# Altium PCB Uzcar.PcbDoc
Units mm, origin at the board's own origin, x right, y up, seen from the top; angles counter-clockwise.
Board outline 90.32 x 30.2 mm, 2 copper layers (Top Layer, Bottom Layer); 70 components, 54 nets, 230 pads, 0 vias.
Unrouted connection lines stored in the file: 159.
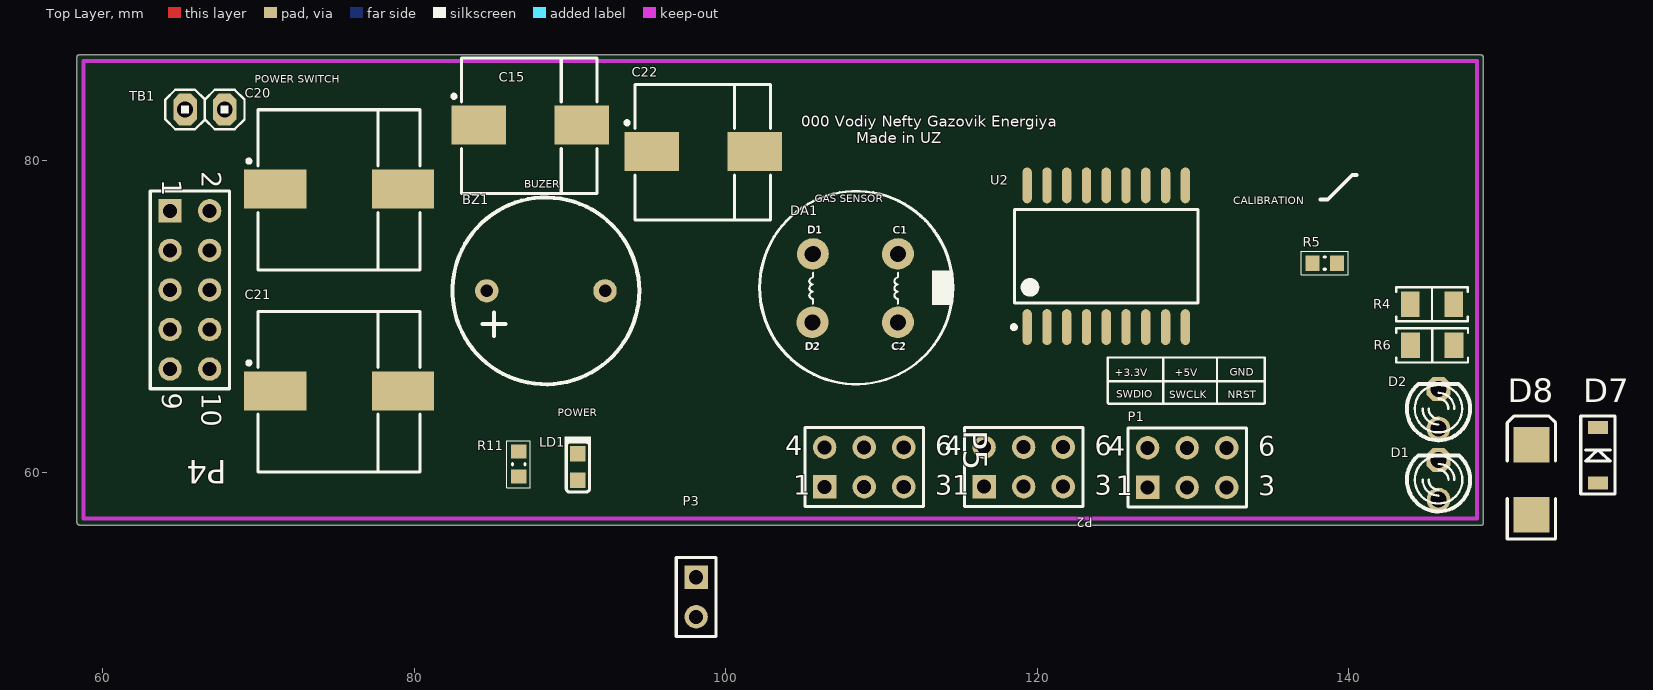
[diagram p0: Top Layer view]
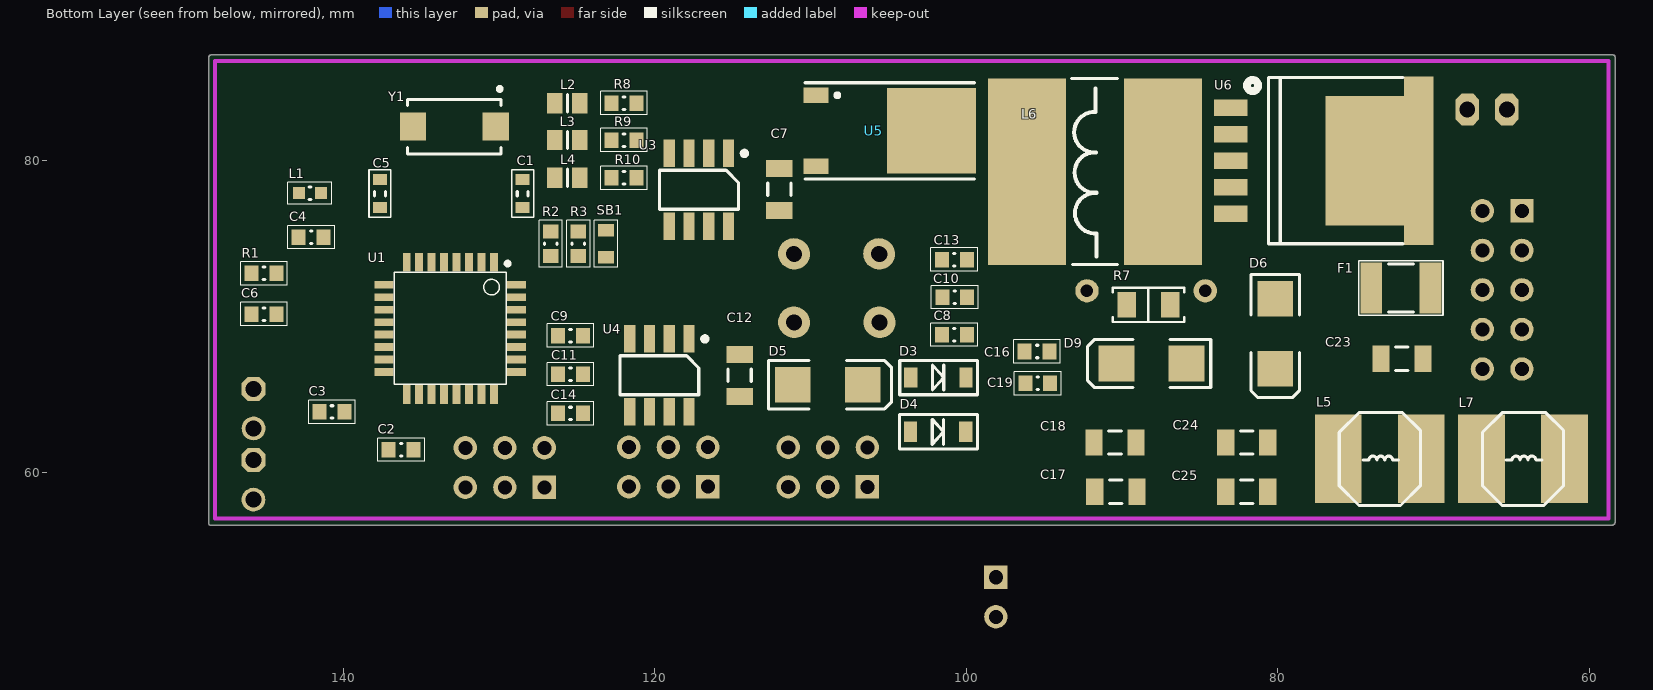
[diagram p1: Bottom Layer view, seen from below]

## Layer stack, top to bottom
Top Solder: solder mask 0.0102, Solder Resist, Dk 3.5
Top Layer: signal copper 0.0356
Dielectric 1: dielectric 0.32, FR-4, Dk 4.8
Bottom Layer: signal copper 0.0356
Bottom Solder: solder mask 0.0102, Solder Resist, Dk 3.5

## Board outline
58.42,56.642 cw(c58.462,56.762) 58.335,56.762 58.335,86.663 cw(c58.462,86.663) 58.462,86.79 148.505,86.79 cw(c148.505,86.663) 148.633,86.663 148.633,56.782 cw(c148.523,56.716) 148.651,56.716 cw(c148.523,56.716) 148.523,56.589 58.523,56.589 cw(c58.523,56.716)

## Design rules (kind name [scope] priority, off if disabled: settings)
Clearance [All] p1: gap=0.254
HoleSize [All] p1: absolutevalues=TRUE maxlimit=1.5 minlimit=0.025 maxpercent=80.000 minpercent=20.000
NetAntennae [All] p1: netantennaetolerance=0.254
PolygonConnect [All] p1: connectstyle=Relief reliefconductorwidth=0.254 reliefentries=4 polygonreliefangle="90 Angle" airgapwidth=0.254
RoutingVias [All] p1: holewidth=0.5 width=1 viastyle="Through Hole" minholewidth=0.17 minwidth=0.5 maxholewidth=0.6 maxwidth=1.27
SMDNeckDown [All] p1: percent=100.000
SolderMaskExpansion [All] p1: expansion=0.102
Width [All] p1: maxlimit=0.254 minlimit=0.254 preferedwidth=0.254
28 further rules are at their usual default settings.

## Classes and differential pairs
component class "Copy of MCU_32": BZ1 C1 C2 C3 C4 C5 C6 D1 D2 L1 P1 P2 P3 P4 P5 R1 R2 R3 R4 R5 R6 R7 SB1 U1 U2 Y1
component class MCU_32_1: C7 C8 C9 C10 C11 C12 C13 C14 C15 C16 C17 C18 C19 C20 C21 C22 C23 C24 C25 D3 D4 D5 D6 D9 DA1 F1 L2 L3 L4 L5 L6 L7 LD1 R8 R9 R10 R11 TB1 U3 U4 U5 U6

## Components (designator, comment, footprint, x,y, rotation, side; value= is the part's Value field where it differs from the comment)
BZ1 "HCM-1203A" HCM-1203A 88.445,71.642 r90 top
C1 "22pF 6v" CAP0603 128.485,77.885 r270 bottom
C2 "100nF 6v" 0603C 136.286,61.437 r180 bottom
C3 "100nF 6v" 0603C 140.726,63.867 r0 bottom
C4 "100nF 6v" 0603C 142.068,75.088 r0 bottom
C5 "22pF 6v" CAP0603 137.655,77.885 r270 bottom
C6 "100nF 6v" 0603C 145.101,70.149 r180 bottom
C7 "1uF 16V" C1206 111.997,78.16 r90 bottom
C8 "1uF 16v" 0603C 100.764,68.828 r180 bottom
C9 "100nF 16v" 0603C 125.415,68.765 r180 bottom
C10 "1uF 16v" 0603C 100.739,71.23 r180 bottom
C11 "100nF 16v" 0603C 125.415,66.288 r180 bottom
C12 "1uF 16V" C1206 114.556,66.212 r90 bottom
C13 "1uF 16v" 0603C 100.764,73.65 r180 bottom
C14 "100nF 16v" 0603C 125.415,63.769 r180 bottom
C15 "470uF 16v" C_EL_8 87.438,82.239 r0 top
C16 "100nF 6v" 0603C 95.449,67.747 r180 bottom
C17 "0.1uF 16v" C1206 90.394,58.745 r180 bottom
C18 "1uF 16V" C1206 90.445,61.905 r180 bottom
C19 "1uF 6v" 0603C 95.405,65.701 r0 bottom
C20 "470uF 35v" C_EL_10 75.169,78.074 r0 top
C21 "470uF 35v" C_EL_10 75.169,65.12 r0 top
C22 "470uF 16v" C_EL_8 98.562,80.538 r0 top
C23 "0.1uF 35V" C1206 72.022,67.276 r0 bottom
C24 "0.1uF 35V" C1206 81.987,61.905 r180 bottom
C25 "1uF 35V" C1206 81.987,58.748 r180 bottom
D1 "LED GREEN" "My Green Led" 144.987,58.771 r90 top
D2 "LED RED" My_LED3MM 145.769,64.075 r90 top
D3 "BZT52C3V3" SOD-123 103.566,66.074 r180 bottom
D4 "BZT52C3V3" SOD-123 103.583,62.59 r180 bottom
D5 "SS34" SMB 108.892,65.613 r180 bottom
D6 "SS34" SMB 80.159,68.887 r270 bottom
D7 "BZT52C3V3" SOD-123 156.007,59.309 r90 top
D8 "SS34" SMB 151.74,59.512 r90 top
D9 "SS34" SMB 88.1,66.978 r0 bottom
DA1 "MC105" MC105 108.494,71.673 r0 top
F1 "Fuse 2" 1812 72.084,71.825 r180 bottom
L1 "100uH 20mA" 0603L 142.145,77.921 r180 bottom
L2 "10mH" 6-0805_L 125.614,83.687 r180 bottom
L3 "10mH" 6-0805_L 125.614,81.325 r180 bottom
L4 "10mH" 6-0805_L 125.614,78.912 r180 bottom
L5 "100uH 3A" NR60 73.43,60.776 r180 bottom
L6 "100mH" IND12500 92.302,79.318 r180 bottom
L7 "100uH 3A" NR60 64.235,60.776 r180 bottom
LD1 "GREEN" 0603D_R 90.501,60.33 r270 top
P1 "PROGRAMER" HDR2X3_CEN 127.089,59.022 r0 top
P2 "MOD 1" HDR2X3_CEN 116.589,59.064 r0 top
P3 "MHDR1X2" HDR1X2 98.093,53.251 r270 top
P4 "Header 5X2" HDR2X5 64.313,76.784 r270 top
P5 "MOD 2" HDR2X3_CEN 106.35,59.055 r0 top
R1 "10K" 0603R 145.101,72.767 r180 bottom
R2 "50K" 0603R 126.683,74.667 r90 bottom
R3 "1K" 0603R 124.908,74.667 r270 bottom
R4 "1k" "RES 1206/3216" 145.349,70.784 r0 top
R5 "10K" 0603R 138.464,73.427 r180 top
R6 "1k" "RES 1206/3216" 145.368,68.142 r0 top
R7 "1k" "RES 1206/3216" 88.301,70.741 r0 bottom
R8 "1K" 0603R 121.982,83.698 r180 bottom
R9 "1K" 0603R 121.982,81.325 r180 bottom
R10 "1K" 0603R 121.982,78.897 r180 bottom
R11 "1K" 0603R 86.7,60.514 r90 top
SB1 "Circuit Breaker" SB_0603 123.124,74.667 r270 bottom
TB1 "SW" "terminal block2p" 66.804,83.54 r180 top
U1 "STM32F030K6T6" LQFP32_0R5_7X7 133.135,69.232 r0 bottom
U2 "ULN2804" SOL-18_N 124.434,73.865 r90 top
U3 "LM358AD" SO-8 117.166,78.135 r270 bottom
U4 "LM358AD" SO-8 119.706,66.223 r270 bottom
U5 "AMS1117-5V" AMS1117 119.066,111.181 r270 bottom
U6 "LM2596S" TO-263 70.945,80.001 r0 bottom
Y1 "XTAL" 3SMXA 132.877,82.186 r0 bottom

## Footprints (in the part's own frame and the unit in brackets; to place one, negate y for a bottom-side part, rotate by r counter-clockwise, add the part's x,y. Pads: shape width x height; smd on the part's side, far side on the other; paste and mask are expansions set on the pad)
3SMXA [mm] "Quartz Crystal, SM; Body 6.2 x 3.7 mm (LxW max)"
  rect 1.7x1.8 smd: 1(-2.65,0) 2(2.65,0)
  silkscreen extent -3.04,-2.55 3,1.75, body extent -2.7,-1.4 2.7,1.4, height 1.3
6-0805_L [mm] "Chip Resistor, Body 2.0x1.2mm, IPC High Density"
  rect 1x1.3 smd: 1(-0.8,0) 2(0.8,0)
  silkscreen extent 0,-0.55 0,0.55, body extent -1,-0.64 1,0.64, height 1.27
0603C [mm] "Chip Capacitor, Body 1.6x0.8mm, Height 1.0mm, IPC Medium Density"
  rect 0.9x1 smd: 1(-0.8,0) 2(0.8,0)
  silkscreen extent -1.5,-0.75 1.5,0.75, body extent -0.87,-0.48 0.88,0.47, height 1
0603D_R [mm] "LED, SMT, Body 1.6 x 0.8 mm, 0.25mm Thickness"
  rect 1x1 smd paste+0 mask+0: 1(0.85,0) 2(-0.85,0)
  silkscreen extent -1.97,-0.85 1.6,0.86, body extent -0.8,-0.4 0.8,0.4, height 0.25
0603L [mil] "Bead 0603L"
  rect 30x30 smd: 1(27.5,0) 2(-27.5,0)
  silkscreen extent -56,-28 55,28, body extent -34,-19 34,19, height 24
0603R [mm] "Chip Resistor, Body 1.6x0.8mm, IPC Medium Density"
  rect 0.9x1 smd: 1(-0.8,0) 2(0.8,0)
  silkscreen extent -1.5,-0.75 1.5,0.75, body extent -0.85,-0.47 0.85,0.47, height 0.6
1812 [mm] "Chip Capacitor, Body 4.5x3.2mm, IPC High Density"
  rect 1.4x3.3 smd: 1(-1.9,0) 2(1.9,0)
  silkscreen extent -2.7,-1.75 2.7,1.75, body extent -2.36,-1.74 2.37,1.74, height 1.03
AMS1117 [mm]
  rect 1x1.6 smd: 1(26.976,9.432) 3(31.546,9.432)
  rect 5.5x5.7 smd: 2(29.261,16.832)
  silkscreen extent 26.18,8.73 32.35,19.58, body extent 25.99,9.23 32.53,19.16, height 2.34
C1206 [mm] "Chip Capacitor, Body 3.2x1.6mm, IPC High Density"
  rect 1.1x1.7 smd: 1(-1.35,0) 2(1.35,0)
  silkscreen extent -0.4,-0.75 0.4,0.75, body extent -1.7,-0.9 1.7,0.9, height 1.3
C_EL_8 [mm]
  rect 3.5x2.5 smd: 1(-3.3,0.05) 2(3.3,0.05)
  silkscreen extent -5,-4.35 4.3,4.35, body extent -4.5,-4.15 4.5,4.15, height 6.9
C_EL_10 [mm]
  rect 4x2.5 smd: 1(-4.1,0.1) 2(4.1,0.1)
  silkscreen extent -5.9,-5.1 5.2,5.2, body extent -5.5,-5.15 5.5,5.15, height 12.6
CAP0603 [mm] "Chip Capacitor, 2-Leads, Body 1.6x0.8mm, IPC Medium Density"
  rect 0.7x0.9 smd: 1(-0.9,0) 2(0.9,0)
  silkscreen extent -1.53,-0.7 1.52,0.7, body extent -0.8,-0.4 0.8,0.4, height 0.3
HCM-1203A [mm] "Buzzer"
  round 1.5 hole 0.8: 1(0,3.8) 2(0,-3.8)
  silkscreen extent -6,-6 6,6, body extent -6,-6 6,6, height 9.5
HDR1X2 [mm] "Connector; Header; 2 Position"
  rect 1.5x1.5 hole 0.9: 1(0,0)
  round 1.5 hole 0.9: 2(2.54,0)
  silkscreen extent -1.27,-1.27 3.81,1.27, body extent -1.27,-1.27 3.81,1.27, height 8.03
HDR2X3_CEN [mm] "Connector; Header; 3x2 Position"
  rect 1.5x1.5 hole 0.9: 1(0,0)
  round 1.5 hole 0.9: 2(2.54,0) 3(5.08,0) 4(0,2.54) 5(2.54,2.54) 6(5.08,2.54)
  silkscreen extent -1.27,-1.27 6.35,3.81, body extent -1.27,-1.27 6.35,3.77, height 8.5
HDR2X5 [mm] "Connector; Header; 5x2 Position"
  rect 1.5x1.5 hole 0.9: 1(0,0)
  round 1.5 hole 0.9: 2(0,2.54) 3(2.54,0) 4(2.54,2.54) 5(5.08,0) 6(5.08,2.54) 7(7.62,0) 8(7.62,2.54) 9(10.16,0) 10(10.16,2.54)
  silkscreen extent -1.27,-1.27 11.43,3.81, body extent -5.1,-10.62 15.25,2.88, height 9.02
IND12500 [mm]
  rect 5x12 smd: 1(-3.796,-0.025) 2(4.933,-0.025)
  silkscreen extent -0.93,-6 2.02,5.97, body extent -5.67,-6.28 6.83,6.22, height 7.9
LQFP32_0R5_7X7 [mm] "LQFP32 Recommended ,32 Pin MCU Size,7x7mm, Pitch, 0.8mm"
  rect 0.5x1.2 smd: 1(-2.8,-4.25) 2(-2,-4.25) 3(-1.2,-4.25) 4(-0.4,-4.25) 5(0.4,-4.25) 6(1.2,-4.25) 7(2,-4.25) 8(2.8,-4.25) 17(2.8,4.25) 18(2,4.25) 19(1.2,4.25) 20(0.4,4.25) 21(-0.4,4.25) 22(-1.2,4.25) 23(-2,4.25) 24(-2.8,4.25)
  rect 1.2x0.5 smd: 9(4.25,-2.8) 10(4.25,-2) 11(4.25,-1.2) 12(4.25,-0.4) 13(4.25,0.4) 14(4.25,1.2) 15(4.25,2) 16(4.25,2.8) 25(-4.25,2.8) 26(-4.25,2) 27(-4.25,1.2) 28(-4.25,0.4) 29(-4.25,-0.4) 30(-4.25,-1.2) 31(-4.25,-2) 32(-4.25,-2.8)
  silkscreen extent -3.81,-4.29 3.6,3.6, body extent -4.55,-4.55 4.6,4.6, height 1.62
MC105 [mm]
  round 2 hole 1: C1(2.537,2.329) C1(2.588,2.355) C2(2.537,-2.065) C2(2.588,-2.039) D1(-2.924,2.329) D1(-2.873,2.355) D2(-2.949,-2.065) D2(-2.899,-2.039)
  silkscreen extent -6.35,-6.04 6.11,6.38, body extent -6.25,-5.92 6,6.3, height 9
"My Green Led" [mil]
  round 60 hole 40: A(-21,-31)
  oct 60x60 hole 40: K(79,-31)
  silkscreen extent -51,-111 91,49, body extent -49,-90 107,48, height 212
My_LED3MM [mil]
  round 60 hole 40: A(-50,0)
  oct 60x60 hole 40: K(50,0)
  silkscreen extent -80,-80 62,80, body extent -66,-65 61,65, height 196
NR60 [mm] "TAIYO INDUCTOR"
  rect 3x5.7 smd: 1(-2.671,0.079) 2(2.654,0.079)
  silkscreen extent -2.62,-2.92 2.59,3.05, body extent -2.5,-2.4 2.5,2.6, height 2.85
"RES 1206/3216" [mm] "Chip Resistor, 2-Leads, Body 3.13x1.55mm, IPC Medium Density"
  rect 1.2x1.65 smd: 1(-1.4,0) 2(1.4,0)
  silkscreen extent -2.3,-1.1 2.3,1.1, body extent -1.58,-0.8 1.62,0.8, height 0.6
SB_0603 [mil] "Jumper"
  rect 32x40 smd: 1(33.75,0) 2(-33.75,0)
  silkscreen extent -59,-30 59,30, body extent -30,-15 32,16, height 18
SMB [mm] "DO-214-AA/SMB; 2 C-Bend Leads; Body 5.3 x 3.6 mm, inc. leads (LxW)"
  rect 2.3x2.3 smd: 1(-2.25,0) 2(2.25,0)
  silkscreen extent -3.8,-1.55 4.1,1.55, body extent -2.6,-1.8 2.6,1.8, height 2.4
SO-8 [mm]
  rect 1.78x0.72 smd: 1(-2.336,1.905) 2(-2.336,0.635) 3(-2.336,-0.635) 4(-2.336,-1.905) 5(2.344,-1.905) 6(2.344,-0.635) 7(2.344,0.635) 8(2.344,1.905)
  silkscreen extent -2.49,-2.54 1.25,3.07, body extent -2.99,-2.44 3.01,2.46, height 1.7
SOD-123 [mm] "SOD-123 diode package"
  rect 0.85x1.3 smd: 1(0,0) 2(3.55,0)
  silkscreen extent -0.7,-1.1 4.3,1.1, body extent -0.18,-0.9 3.72,0.9, height 1.18
SOL-18_N [mm] "18-Pin Small Outline Integrated Circuit 1.27 mm Pitch, IPC Medium Density"
  oval 2.3x0.6 smd: 1(-4.55,5.08) 2(-4.55,3.81) 3(-4.55,2.54) 4(-4.55,1.27) 5(-4.55,0) 6(-4.55,-1.27) 7(-4.55,-2.54) 8(-4.55,-3.81) 9(-4.55,-5.08) 10(4.55,-5.08) 11(4.55,-3.81) 12(4.55,-2.54) 13(4.55,-1.27) 14(4.55,0) 15(4.55,1.27) 16(4.55,2.54) 17(4.55,3.81) 18(4.55,5.08)
  silkscreen extent -4.67,-5.9 3,6.05, body extent -5.3,-5.87 5.3,5.88, height 2.62
"terminal block2p" [mil]
  oct 60x80 hole 40: 1(-40,10) 2(60,10)
  silkscreen extent -90,-40 110,60, body extent -99,-120 119,136, height 341
TO-263 [mm]
  rect 2.16x1.07 smd: 1(12.065,-3.404) 2(12.065,-1.702) 3(12.065,0) 4(12.065,1.702) 5(12.065,3.404)
  rect 1.91x10.8 smd: 3(0,0)
  rect 5.08x8.33 smd: 3(3.429,0)
  silkscreen extent 1.02,-5.33 11.03,5.33, body extent -0.9,-5.06 13.11,5.1, height 4.56

## Part data
BZ1: "HCM-1203A buzzer"
C1 C5: library part Capacitor_np
C2: library part Cap, "Capacitor 100nF 5v"
C3 C4: library part Cap, "Capacitor"
C6 C9 C11 C14: library part CAP, "Capacitor"
C7: library part C, "Capacitor 1uF 16v"
C8 C10 C13 C19: library part "CAP SMD 0603  X5R 1µF 25V 10%", "0603  X5R 1µF"
C12 C18: library part C, "Capacitor 1uF 16V"
C15 C20 C21 C22: library part CP, "Capacitor polarized"
C16: library part Capacitor_ST, "Capacitor 0402 / 0603 / 0805"
C17: library part C, "Capacitor 0.1uF 12V"
C23: library part C, "Capacitor 0.1uF 35V"
C24: library part C, "Capacitor 0.1uF 25V"
C25: library part C, "Capacitor 1uF 25V"
D1 D2: library part LED3m, "Typical INFRARED GaAs LED"
D3 D4 D7: library part BZT52C3V6, "Surface Mount Zener Diode"
D5 D6 D8 D9: library part "D Schottky", "Schottky Diode 40V 3A"
F1: "Fuse"
L1 L2 L3 L4 L6: library part Inductor, "Inductor"
L5: library part L, "Inductor 100uH 3A"
L7: library part L, "Inductor 100uH 23"
LD1: library part PHOTO
P1 P2 P5: library part "Header 3X2A", "Header, 3-Pin, Dual row"
P3: "Header, 2-Pin"
P4: "Header, 5-Pin, Dual row"
R1 R2 R5 R8 R9 R10: library part Res1, "Resistor"
R3: library part res1, "Resistor"
R4 R6 R7: library part Resistor1, "Resistor"
R11: library part Resistor_ST, "Resistor 0402 / 0603 / 0805"
TB1: library part "Terminal block 2p", "Terminal block 2p 2.54mm"
U1: library part MCU_LQFP32
U2: library part ULN2803, "HIGH-VOLTAGE,HIGH-CURRENT DARLINTON ARRAYS"
U3 U4: "Dual Operational Amplifier"
U5: library part AMS1117
U6: library part "TI LM2596"
Y1: "Crystal Oscillator 0.197\" L x 0.126\" W (5.00mm x 3.20mm)"

## Nets (pads, with @x,y where several pads share a name; then routed paths per layer and width w, separated by ;. In a path a pad name is that pad's centre, name@x,y a point inside that pad or via, vN(x,y) a via of type N, cw(c..) or ccw(c..) an arc to the next point about the centre after c; other vN are vias at no path point)
5V: BZ1.1 C7.1 C12.1 C17.1 C18.1 C22.1 L6.2 P1.5 P4.1 P4.4 P5.1 R4.2 R6.2 R7.1 U2.10 U3.8 U4.8 U5.3 U6.4
AVDD: C4.1 L1.1 U1.5
BOOT0: R3.1 SB1.2
GND: C1.2 C2.2 C3.2 C4.2 C5.2 C6.1 C7.2 C8.2 C9.2 C10.2 C11.2 C12.2 C13.2 C14.2 C15.2 C16.1 C17.2 C18.2 C19.2 C21.2 C22.2 C24.2 C25.2 D3.1 D4.1 D5.1 D9.1 L7.2 LD1.2 P1.6 P2.3 P3.2 P4.3 P4.6 P5.3 R3.2 U1.16 U1.32 U2.9 U3.4 U4.2 U4.3 U4.4 U5.1 U6.3 U6.5
NetBZ1_2: BZ1.2 R7.2 U2.13
NetC6_2: C6.2 P1.3 R1.2 U1.4
NetC8_1: C8.1 C9.1 L2.2 U3.3
NetC10_1: C10.1 C11.1 L3.2 U3.5
NetC13_1: C13.1 C14.1 L4.2 U4.5
NetC20_1: C20.1 C23.1 D6.2 L5.1
NetC20_2: C20.2 C23.2 L7.1 P4.9 P4.10
NetC21_1: C21.1 C24.1 C25.1 L5.2 U6.1
NetD1_A: D1.A R4.1
NetD1_K: D1.K U2.15
NetD2_A: D2.A R6.1
NetD2_K: D2.K U2.14
NetD3_2: D3.2 L2.1 R8.1
NetD4_2: D4.2 L3.1 R9.1
NetD5_2: DA1.C1
NetD6_1: DA1.D1
NetD7_2: D5.2 L4.1 R10.1
NetD8_1: D6.1 F1.2
NetD9_2: D9.2 L6.1 U6.2
NetDA1_C2: DA1.C2 DA1.D2 R8.2
NetF1_1: F1.1 TB1.1
NetLD1_1: LD1.1 R11.1
NetP1_1: P1.1 U1.23
NetP1_2: P1.2 U1.24
NetP2_1: P2.1 U1.19
NetP2_2: P2.2 U1.20
NetP2_4: P2.4 U1.8
NetP2_5: P2.5 U1.21
NetP2_6: P2.6 P5.6 U2.16
NetP3_1: P3.1 R5.2 U1.18
NetP4_2: P4.2 R10.2
NetP4_5: P4.5 R9.2
NetP4_7: P4.7 P4.8 TB1.2
NetP5_4: P5.4 U2.18
NetP5_5: P5.5 U2.17
NetR2_1: R2.1 SB1.1 U1.31
NetU1_7: U1.7 U3.1 U3.2
NetU1_9: U1.9 U4.6 U4.7
NetU1_10: U1.10 U3.6 U3.7
NetU1_11: U1.11 U2.7
NetU1_12: U1.12 U2.8
NetU1_14: U1.14 U2.5
NetU1_15: U1.15 U2.6
NetU1_26: U1.26 U2.4
NetU1_27: U1.27 U2.1
NetU1_28: U1.28 U2.2
NetU1_29: U1.29 U2.3
PF0: C1.1 U1.2 Y1.1
PF1: C5.1 U1.3 Y1.2
VDD: C2.1 C3.1 C15.1 C16.2 C19.1 L1.2 P1.4 P5.2 R1.1 R2.2 R5.1 R11.2 U1.1 U1.17 U5.2
pads on no net: D7.1 D7.2 D8.1 D8.2 U1.6 U1.13 U1.22 U1.25 U1.30 U2.11 U2.12 U4.1

## Keep-outs
Keep-Out Layer:
  lines w0.254: 58.75,57.023 148.234,57.023 148.234,86.411 58.75,86.411 58.75,57.023

## Silkscreen, mask and mechanical layers (free items; w line width, h text height)
Top Overlay:
  lines w0.15: 124.536,65.837 134.569,65.837 ; 128.092,64.414 128.092,67.259 ; 131.547,64.389 131.547,67.335 ; 134.569,64.389 124.587,64.389 124.536,64.44 124.536,67.361 134.62,67.361 134.62,64.414
  lines w0.254: 138.176,77.521 138.659,77.521 140.233,79.096 140.513,79.096
  text "POWER SWITCH" at 69.745,84.992 h0.5
  text "000 Vodiy Nefty Gazovik Energiya /            Made in UZ" at 104.842,81.124 h0.7
  text "BUZER" at 87.053,78.262 h0.5
  text "GAS SENSOR" at 105.711,77.347 h0.5
  text "CALIBRATION" at 132.595,77.212 h0.5
  text "GND" at 132.356,66.196 h0.5
  text "+3.3V" at 124.98,66.158 h0.5
  text "+5V" at 128.841,66.158 h0.5
  text "SWDIO" at 125.092,64.773 h0.5
  text "SWCLK" at 128.47,64.748 h0.5
  text "NRST" at 132.229,64.748 h0.5
  text "POWER" at 89.201,63.598 h0.5
Board:
  lines w0.254: 58.462,56.762 58.462,86.663 148.505,86.663 148.505,56.762 ; 58.523,56.716 148.523,56.716
Mechanical 13:
  circle w0.254: c108.534,71.704 r4.826
  rectangle: 63.195,65.43 68.021,77.953

## Text inside footprints (layer, text, board x,y; h text height)
DA1: Top Overlay "D1" at 105.278,75.345 h0.5; Top Overlay "D2" at 105.126,67.852 h0.5; Top Overlay "C1" at 110.765,75.319 h0.5; Top Overlay "C2" at 110.689,67.852 h0.5; Top Overlay "D1" at 105.228,75.319 h0.5; Top Overlay "D2" at 105.075,67.826 h0.5; Top Overlay "C1" at 110.714,75.294 h0.5; Top Overlay "C2" at 110.638,67.826 h0.5
P1: Top Overlay "4" at 124.549,61.054 h1.27; Top Overlay "1" at 125.057,58.514 h1.27; Top Overlay "3" at 134.201,58.514 h1.27; Top Overlay "6" at 134.201,61.054 h1.27
P2: Top Overlay "4" at 114.049,61.096 h1.27; Top Overlay "1" at 114.557,58.556 h1.27; Top Overlay "3" at 123.701,58.556 h1.27; Top Overlay "6" at 123.701,61.096 h1.27
P4: Top Overlay "2" at 66.345,79.324 h1.27 r270; Top Overlay "1" at 63.805,78.816 h1.27 r270; Top Overlay "9" at 63.805,65.1 h1.27 r270; Top Overlay "10" at 66.345,65.1 h1.27 r270
P5: Top Overlay "4" at 103.81,61.087 h1.27; Top Overlay "1" at 104.318,58.547 h1.27; Top Overlay "3" at 113.462,58.547 h1.27; Top Overlay "6" at 113.462,61.087 h1.27